# Altium PCB BIO26_pishield.PcbDoc (part 2 of 2)
Units mm, origin at the board's own origin, x right, y up, seen from the top; angles counter-clockwise.
Board outline 69 x 56 mm, 4 copper layers (Top Layer, Int1 (GND), Int2 (PWR), Bottom Layer), stack 1.369 mm thick; 29 components, 69 nets, 266 pads, 109 vias.
Unrouted connection lines stored in the file: 49.
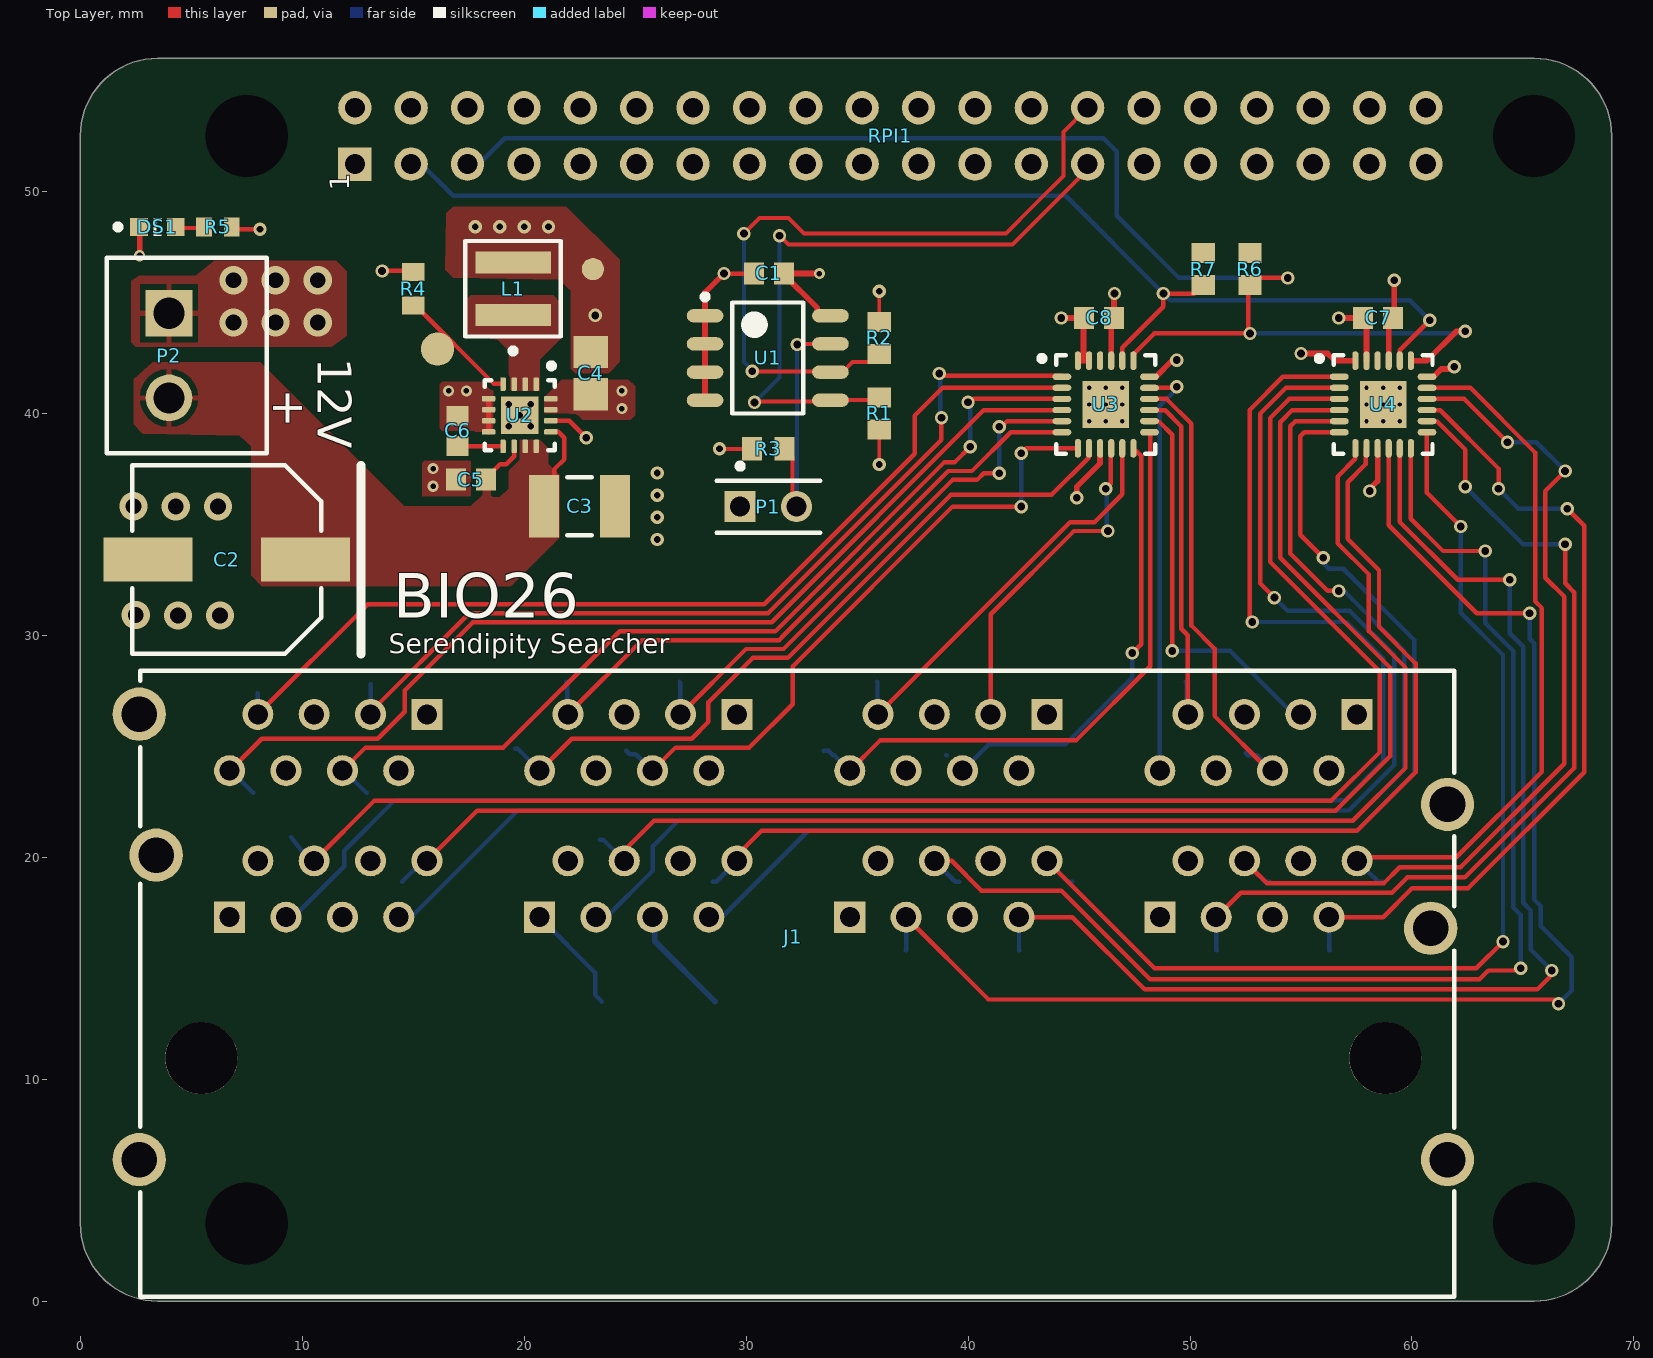
[diagram p0: Top Layer view]

## Polygon pours and split planes (outlines as drawn) (continued)
+3V3 on Int2 (PWR) (split plane): 65.735,55.483 65.968,55.455 66.199,55.409 66.425,55.345 66.645,55.264 66.858,55.166 67.063,55.051 67.259,54.92 67.443,54.775 67.616,54.616 67.775,54.443 67.92,54.259 68.051,54.063 68.166,53.858 68.264,53.645 68.345,53.425 68.409,53.199 68.455,52.968 68.483,52.735 68.491,52.516 68.49,52.5 68.49,28.701 27.777,28.506 27.777,29.5 27.777,33.2 27.777,38.876 27.777,38.878 27.777,38.881 27.773,38.915 27.77,38.949 27.769,38.952 27.769,38.954 27.758,38.987 27.748,39.02 27.747,39.022 27.746,39.025 27.73,39.055 27.713,39.085 27.712,39.087 27.711,39.089 27.688,39.116 27.666,39.142 27.665,39.144 27.663,39.146 27.636,39.167 27.609,39.189 27.607,39.19 27.605,39.192 27.575,39.208 27.544,39.224 27.542,39.225 27.54,39.226 27.507,39.236 27.474,39.246 27.471,39.246 27.469,39.246 27.434,39.249 27.4,39.253 27.398,39.253 27.395,39.253 26.677,39.244 26.677,55.49 65.5,55.49 65.516,55.491

## Other copper
Bottom Layer:
  pour cut-out: 18.9,42.065 19.1,41.865 19.1,41.165 19.25,41.015 20.55,41.015 20.7,41.165 20.7,42.415 21.8,43.515 21.8,45.565 21.55,45.815 17.3,45.815 16.9,45.415 16.9,43.715 17.2,43.415 18.4,43.415 18.9,42.915
Int1 (GND) (plane layer: these items are gaps in the copper):
  pour cut-out: 18.9,42.065 19.1,41.865 19.1,41.165 19.25,41.015 20.55,41.015 20.7,41.165 20.7,42.415 21.8,43.515 21.8,45.565 21.55,45.815 17.3,45.815 16.9,45.415 16.9,43.715 17.2,43.415 18.4,43.415 18.9,42.915
Int2 (PWR) (plane layer: these items are gaps in the copper):
  pour cut-out: 18.9,42.065 19.1,41.865 19.1,41.165 19.25,41.015 20.55,41.015 20.7,41.165 20.7,42.415 21.8,43.515 21.8,45.565 21.55,45.815 17.3,45.815 16.9,45.415 16.9,43.715 17.2,43.415 18.4,43.415 18.9,42.915
  lines w0.75: 26.3,56 26.3,38.862 27.4,38.876 27.4,33.1 ; 27.4,33.2 27.4,29.5 27.4,28.127 69,28.327

## Silkscreen, mask and mechanical layers (free items; w line width, h text height)
Top Overlay:
  text "1" at 12.115,50.02 h0.89 r90
  text "12V" at 10.7,42.5 h1.52 r270
  text "+" at 8.7,41.1 h1.52 r270
  text "BIO26" at 14.1,30.8 h2
  text "Serendipity Searcher" at 13.9,28.9 h1.5
Bottom Overlay:
  circle w0.5: c11.75,49.25 r0.25
  text "©2019 Commonplace Development" at 50.6,0.5 h1.5
M2: Outline:
  lines w0.254: 0,3.4 0,52.5 ; 0,3.496 ccw(c3.503,3.5) 3.507,-0.003 ; 0,52.492 cw(c3.504,52.496) 3.5,56 65.5,56 cw(c65.496,52.504) 68.992,52.5 68.992,3.5 ; 3.503,0 65.5,0 ccw(c65.496,3.496) 68.992,3.496